# EAGLE board Proximity_sensor_v2 (EAGLE 9.2.0)
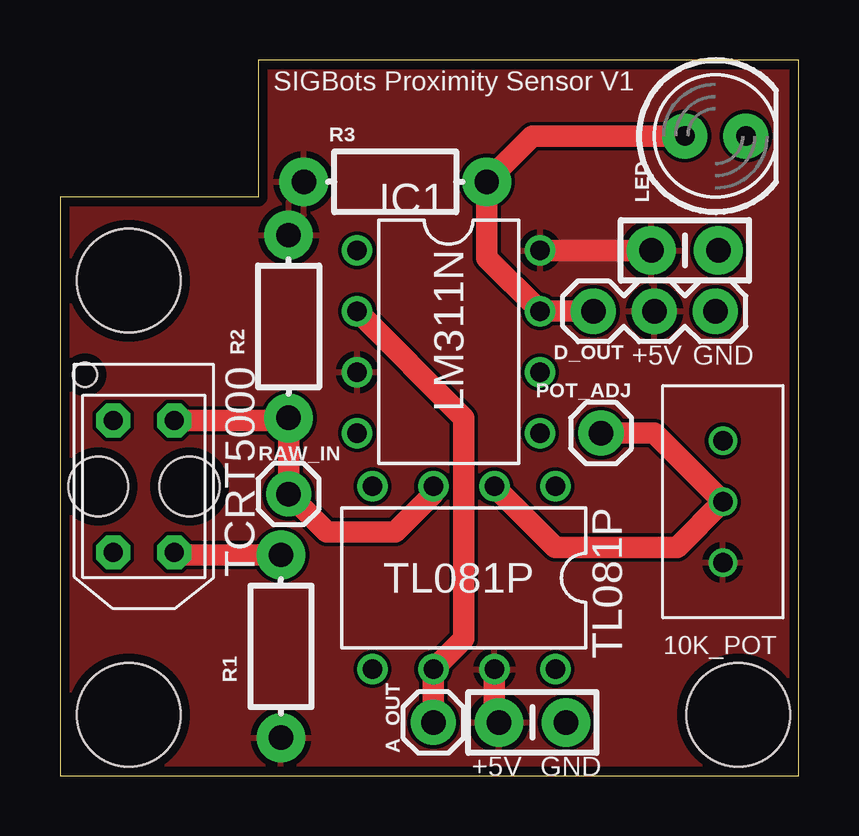
[diagram p0: board, top side]
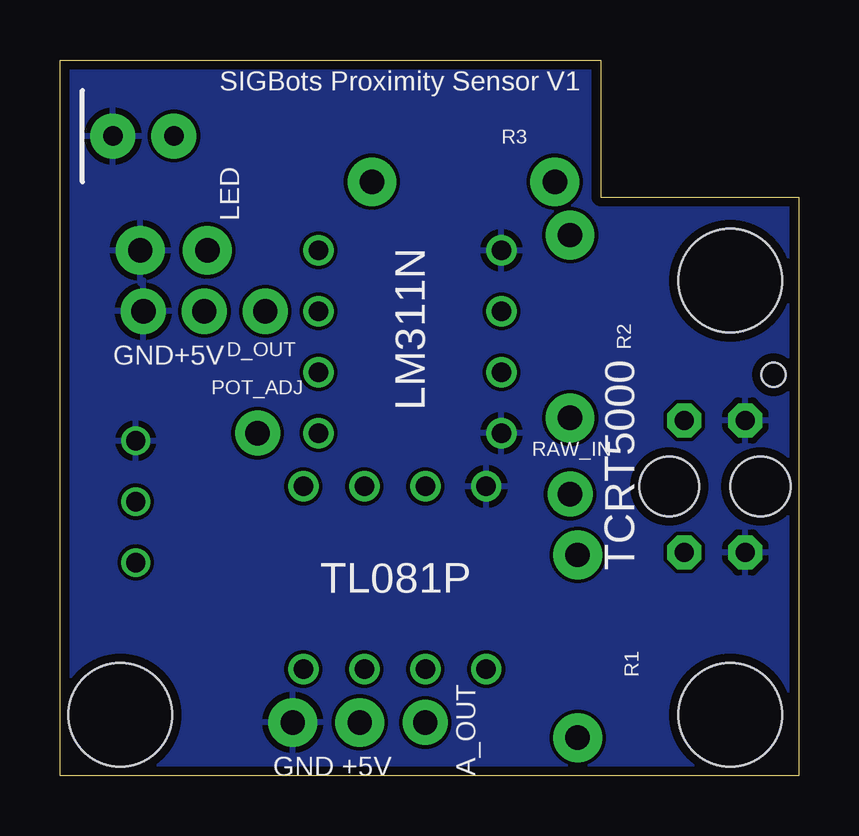
[diagram p1: board, bottom side, seen from below]

Size 30.78 x 29.84 mm. Coordinates in mm from the lower left corner, seen from the top.
Outline: 0,0 30.78,0 30.78,29.83 8.26,29.84 8.26,24.12 0,24.13 0,0
Copper layers (1*16): Top 0.035559375mm / dielectric 1.6mm / Bottom 0.035559375mm
Design rules "oshpark-2layer *": minimum track width 6mil, minimum drill 10mil, track to track 6mil, track to pad 6mil, pad to pad 6mil, via to via 6mil, smd to smd 6mil, copper to edge 15mil, drill to drill 6mil, minimum pad ring 5mil, minimum via ring 5mil, stop-mask expansion 2.5mil, vias tented up to drill 0mil, thermal gap 10mil
Holes 4.32 mm at 2.86,2.54 28.26,2.54 2.86,20.64

## Footprints (pad centres in the part's own frame; a part is rotated, then mirrored left to right if it is on the bottom)
CAP-PTH-SMALL-KIT = drill 1.016 pad 2.032: 1 -1.397,0; 2 1.397,0
TRIM_T93YA103KT20 = drill 0.8: A 0,2.54; B 0,0; C 0,-2.54
1X01 = drill 1.016 pad 1.88: 1 0,0
1X03 = drill 1.016 pad 1.88: 1 0,0; 2 2.54,0; 3 5.08,0
DIL08 = drill 0.813 pad 1.27: 1 -3.81,-3.81; 2 -1.27,-3.81; 3 1.27,-3.81; 4 3.81,-3.81; 5 3.81,3.81; 6 1.27,3.81; 7 -1.27,3.81; 8 -3.81,3.81
LED_5MM = drill 0.813 pad 1.88: A -1.27,0; K 1.27,0
AXIAL-0.3-KIT = drill 1.016 pad 2.032: P$1 -3.81,0; P$2 3.81,0
5000 = drill 0.8 pad 1.422 octagon: P$1 -2.75,1.27; P$2 -2.75,-1.27; P$3 2.75,1.27; P$4 2.75,-1.27 | hole 2.5: 0,1.9; 0,-1.9 | hole 1: -4.65,-2.45

## Placement (x,y rotation side)
0.1_UF  0.1uF  [CAP-PTH-SMALL-KIT]  19.68,2.22 0 top
0.1_UF1  0.1uF  [CAP-PTH-SMALL-KIT]  26.04,21.91 0 top
10K_POT  T93YA103KT20  [TRIM_T93YA103KT20]  27.62,11.43 180 top
A_OUT  [1X01]  15.56,2.22 0 top
D_OUT  [1X03]  27.3,19.37 180 top
IC1  LM311N  [DIL08]  16.19,18.1 270 top
LED  [LED_5MM]  27.3,26.67 0 top
POT_ADJ  [1X01]  22.54,14.29 0 top
R1  100  [AXIAL-0.3-KIT]  9.21,5.4 270 top
R2  4.7k  [AXIAL-0.3-KIT]  9.53,18.73 90 top
R3  220  [AXIAL-0.3-KIT]  13.97,24.77 180 top
RAW_IN  [1X01]  9.53,11.75 0 top
TCRT5000  TCRT5000  [5000]  3.49,12.06 270 top
TL081P  TL081P  [DIL08]  16.83,8.26 180 top

## Library data of the parts
0.1_UF 0.1_UF1 = SparkFun-Capacitors; PROD_ID: CAP-08370
10K_POT = Pot-Multi-turn; DESCRIPTION: Res Cermet Trimmer 10K Ohm 10% 1/2W 21_Elec_/23_Mech_Turn 2.2mm _9.7 X 5 X 11.1mm_ Pin Thru-Hole Tube; DIGI-KEY_PART_NUMBER: T93YA-10K-ND; DIGI-KEY_PURCHASE_URL: https://www.digikey.com/product-detail/en/vishay-sfernice/T93YA103KT20/T93YA-10K-ND/1587711?utm_source=snapeda&utm_medium=aggregator&utm_campaign=symbol; MF: Vishay; MP: T93YA103KT20; PACKAGE: TSOP-34338 Vishay
A_OUT D_OUT POT_ADJ RAW_IN = SparkFun-Connectors
IC1 TL081P = linear
LED = SparkFun-LED
R1-R3 = SparkFun-Resistors
TCRT5000 = tcrt5000

## Nets
5V: 0.1_UF1.1 0.1_UF.1 10K_POT.A D_OUT.2 IC1.3 IC1.8 R1.P$2 R2.P$2 R3.P$2 TL081P.7
A_OUT: A_OUT.1 IC1.2 TL081P.6
GND: 0.1_UF1.2 0.1_UF.2 10K_POT.C D_OUT.1 IC1.1 IC1.4 LED.K TCRT5000.P$2 TCRT5000.P$4 TL081P.4
OUTPUT: D_OUT.3 IC1.7 LED.A R3.P$1
RAW: R2.P$1 RAW_IN.1 TCRT5000.P$1 TL081P.3
REF: 10K_POT.B POT_ADJ.1 TL081P.2
SOURCING: R1.P$1 TCRT5000.P$3

## Tracks (layer width: path | path; a pad name or v marks a point on that pad's centre or on a via)
5V
  Top 0.889: 0.1_UF1.1 IC1.8 | TL081P.7 18.1,2.41 0.1_UF.1
  pour Top: 0,24.13 8.26,24.13 8.26,29.84 30.8,29.84 30.8,0 0,0
A_OUT
  Top 0.889: A_OUT.1 TL081P.6 16.83,5.71 16.83,14.92 IC1.2
GND
  pour Bottom: 0,24.13 8.26,24.13 8.26,29.84 30.8,29.84 30.8,0 0,0
OUTPUT
  Top 0.889: D_OUT.3 IC1.7 17.78,21.59 R3.P$1 19.68,26.67 LED.A
RAW
  Top 0.889: TCRT5000.P$1 9.42,14.81 R2.P$1 RAW_IN.1 11.11,10.16 13.97,10.16 15.56,11.75 TL081P.3
REF
  Top 0.889: POT_ADJ.1 24.77,14.29 10K_POT.B 25.72,9.53 20.64,9.53 TL081P.2
SOURCING
  Top 0.889: TCRT5000.P$3 4.87,9.21 R1.P$1

## Text on the board
tNames: SIGBots Proximity Sensor V1 | +5V | GND | +5V | GND
bNames: SIGBots Proximity Sensor V1 | R3 | LED | R2 | D_OUT | POT_ADJ | +5V | GND | LM311N | RAW_IN | TL081P | R1 | A_OUT | +5V | GND
tValues: 0.1uF | 0.1uF
bValues: 220 | 4.7k | 0.1uF | 100 | 10K_POT | 0.1uF